# Altium PCB MB.PcbDoc
Units mil, origin at the board's own origin, x right, y up, seen from the top; angles counter-clockwise.
Board outline 5140 x 4225 mil, 2 copper layers (Top Layer, Bottom Layer); 58 components, 60 nets, 331 pads, 0 vias.
Unrouted connection lines stored in the file: 188.
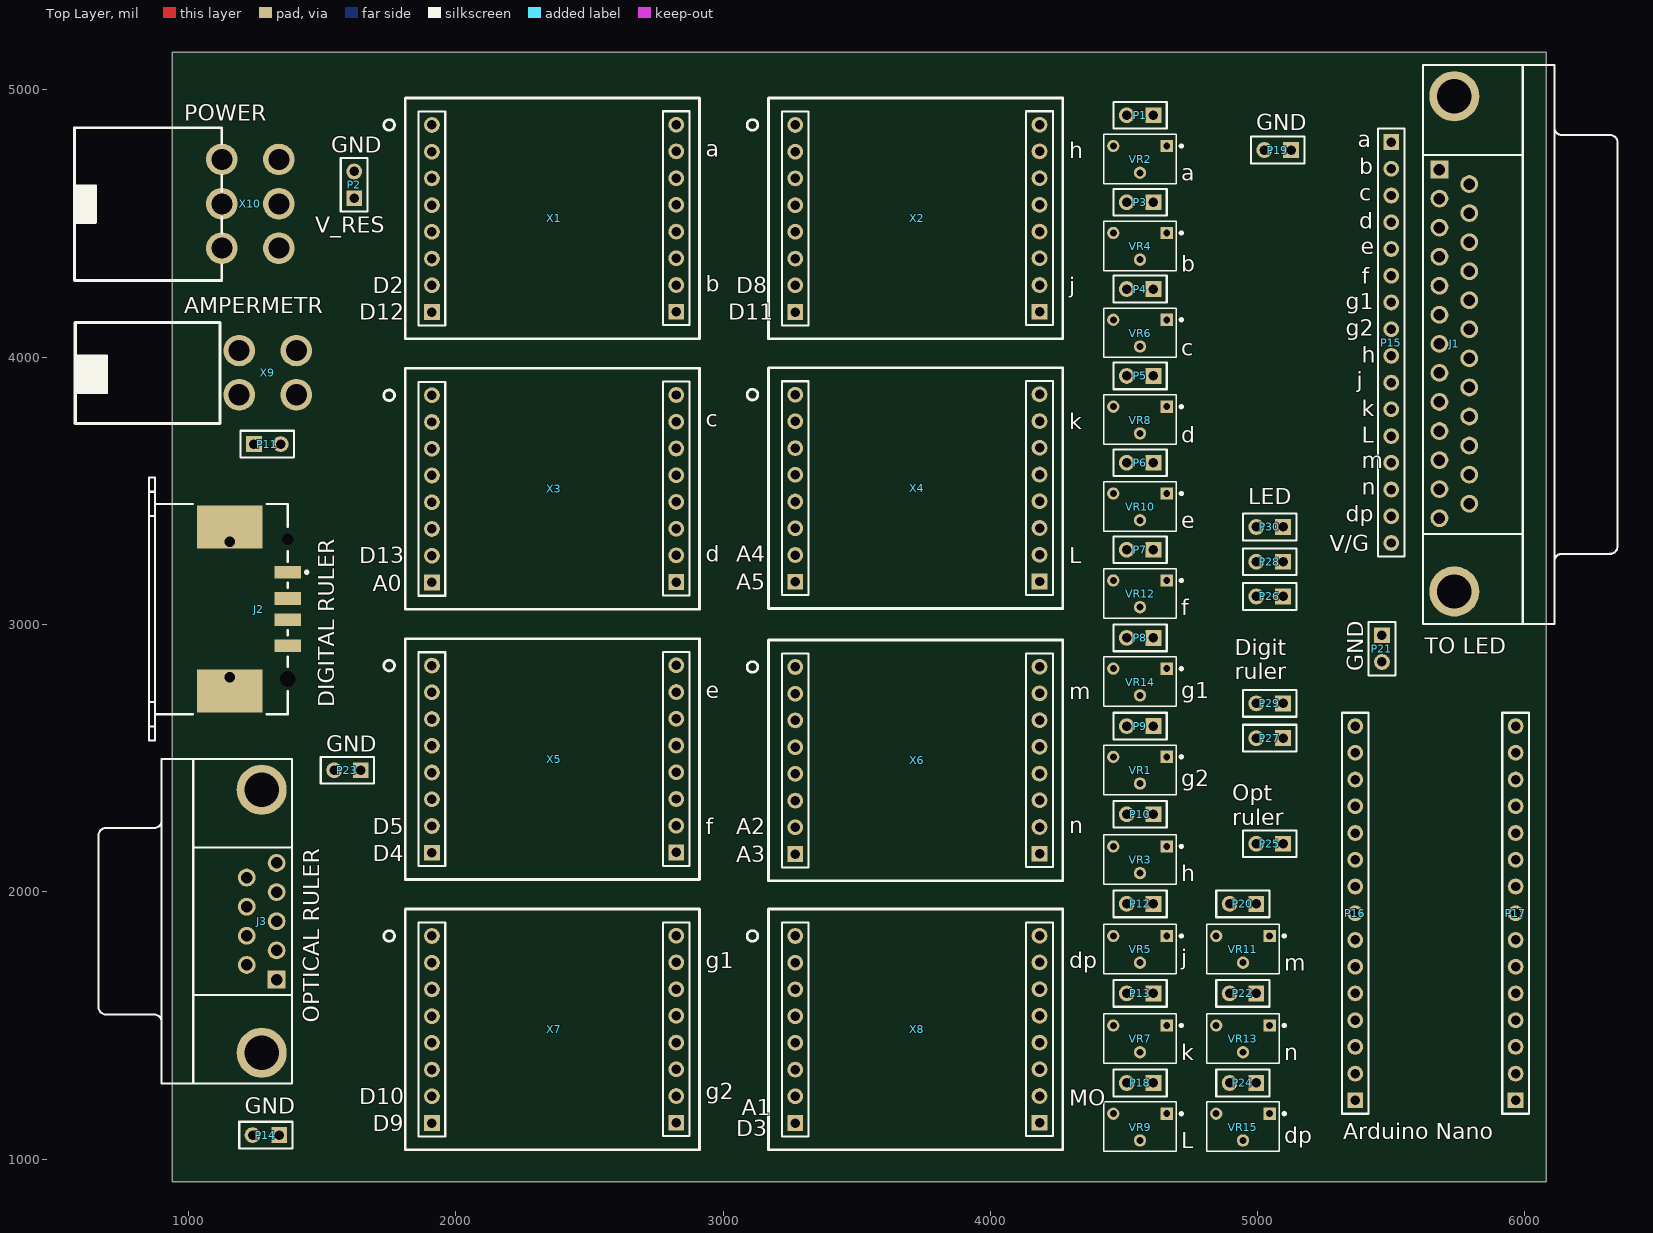
[diagram p0: Top Layer view]
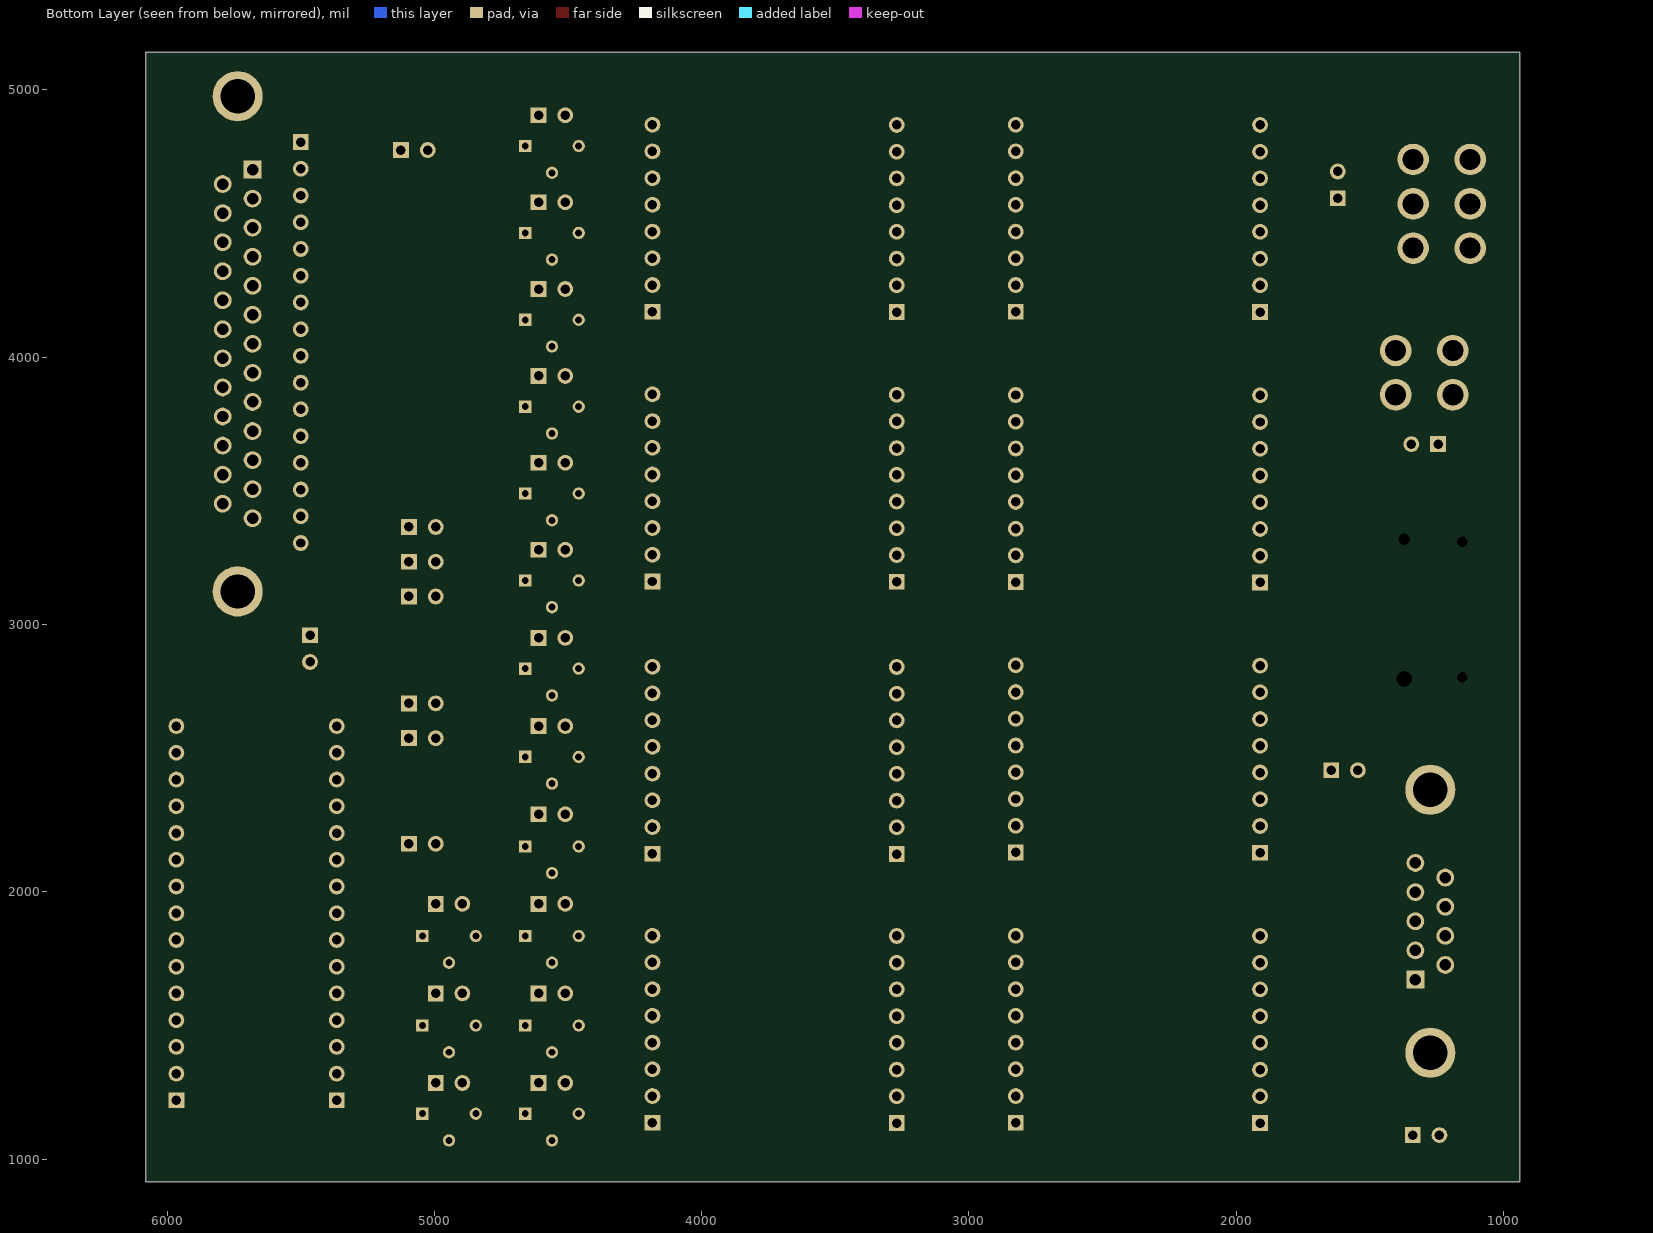
[diagram p1: Bottom Layer view, seen from below]

## Layer stack, top to bottom
Top Solder: solder mask 0.4, Solder Resist, Dk 3.5
Top Layer: signal copper 1.4
Dielectric 1: dielectric 12.6, FR-4, Dk 4.8
Bottom Layer: signal copper 1.4
Bottom Solder: solder mask 0.4, Solder Resist, Dk 3.5

## Board outline
940,915 6080,915 6080,5140 940,5140

## Design rules (kind name [scope] priority, off if disabled: settings)
Clearance [All] p1: gap=10 ignorepadtopadclearanceinfootprint=FALSE except(0: Arc-Hole Track-Hole SMDPad-Hole THPad-Hole Via-Hole Fill-Hole Poly-Hole Region-Hole Text-Hole)
PolygonConnect [All] p1: connectstyle=Relief reliefconductorwidth=10 reliefentries=4 polygonreliefangle="90 Angle" airgapwidth=10
RoutingVias [All] p1: holewidth=28 width=50 viastyle="Through Hole" minholewidth=28 minwidth=50 maxholewidth=28 maxwidth=50
SolderMaskExpansion [All] p1: expansion=4 istentingtop=FALSE
Width [All] p1: maxlimit=10 minlimit=10 preferedwidth=10
30 further rules are at their usual default settings.

## Components (designator, comment, footprint, x,y, rotation, side; value= is the part's Value field where it differs from the comment)
J1 "D Connector 25" DSUB1.385-2H25A 6110,4050 r270 top
J2 "1-353576-1" 353576 875.47,3057.89 r180 top
J3 "D Connector 9" DSUB1.385-2H9 900,1890 r90 top
P1 "Header 2" HDR1X2 4610,4905 r180 top
P2 "Header 2" HDR1X2 1620,4595 r90 top
P3 "Header 2" HDR1X2 4610,4580 r180 top
P4 "Header 2" HDR1X2 4610,4255 r180 top
P5 "Header 2" HDR1X2 4610,3930 r180 top
P6 "GND" HDR1X2 4610,3605 r180 top
P7 "GND" HDR1X2 4610,3280 r180 top
P8 "GND" HDR1X2 4610,2950 r180 top
P9 "GND" HDR1X2 4610,2620 r180 top
P10 "Header 2" HDR1X2 4610,2290 r180 top
P11 "Header 2" HDR1X2 1245,3675 r0 top
P12 "Header 2" HDR1X2 4610,1955 r180 top
P13 "GND" HDR1X2 4610,1620 r180 top
P14 "GND" HDR1X2 1340,1090 r180 top
P15 "Header 16" HDR1X16 5500,4805 r270 top
P16 "Header 15" HDR1X15 5365,1220 r90 top
P17 "Header 15" HDR1X15 5965,1220 r90 top
P18 "GND" HDR1X2 4610,1285 r180 top
P19 "GND" HDR1X2 5125,4775 r180 top
P20 "GND" HDR1X2 4995,1955 r180 top
P21 "GND" HDR1X2 5465,2960 r270 top
P22 "GND" HDR1X2 4995,1620 r180 top
P23 "GND" HDR1X2 1645,2455 r180 top
P24 "GND" HDR1X2 4995,1285 r180 top
P25 "Digit_rul" HDR1X2 5095,2180 r180 top
P26 "Relay" HDR1X2 5095,3105 r180 top
P27 "Optic_rul" HDR1X2 5095,2575 r180 top
P28 "Relay" HDR1X2 5095,3235 r180 top
P29 "Optic_rul" HDR1X2 5095,2705 r180 top
P30 "Relay" HDR1X2 5095,3365 r180 top
VR1 "RES 3266W" "RES 3266W" 4660,2505 r180 top
VR2 "RES 3266W" "RES 3266W" 4660,4790 r180 top
VR3 "RES 3266W" "RES 3266W" 4660,2170 r180 top
VR4 "RES 3266W" "RES 3266W" 4660,4465 r180 top
VR5 "RES 3266W" "RES 3266W" 4660,1835 r180 top
VR6 "RES 3266W" "RES 3266W" 4660,4140 r180 top
VR7 "RES 3266W" "RES 3266W" 4660,1500 r180 top
VR8 "RES 3266W" "RES 3266W" 4660,3815 r180 top
VR9 "RES 3266W" "RES 3266W" 4660,1170 r180 top
VR10 "RES 3266W" "RES 3266W" 4660,3490 r180 top
VR11 "RES 3266W" "RES 3266W" 5045,1835 r180 top
VR12 "RES 3266W" "RES 3266W" 4660,3165 r180 top
VR13 "RES 3266W" "RES 3266W" 5045,1500 r180 top
VR14 "RES 3266W" "RES 3266W" 4660,2835 r180 top
VR15 "RES 3266W" "RES 3266W" 5045,1170 r180 top
X1 "MEZ_RELAY" MEZ_RELAY 1911,4869 r0 top
X2 "MEZ_RELAY" MEZ_RELAY 3270,4869 r0 top
X3 "MEZ_RELAY" MEZ_RELAY 1911,3857.67 r0 top
X4 "MEZ_RELAY" MEZ_RELAY 3270,3860 r0 top
X5 "MEZ_RELAY" MEZ_RELAY 1911,2846.33 r0 top
X6 "MEZ_RELAY" MEZ_RELAY 3270,2841.33 r0 top
X7 "MEZ_RELAY" MEZ_RELAY 1911,1835 r0 top
X8 "MEZ_RELAY" MEZ_RELAY 3270,1835 r0 top
X9 "AMPERMETR" AMP_VOLTMETER 1403.5,4025 r270 top
X10 "POWER" POWER 1125,4740 r90 top

## Footprints (in the part's own frame and the unit in brackets; to place one, negate y for a bottom-side part, rotate by r counter-clockwise, add the part's x,y. Pads: shape width x height; smd on the part's side, far side on the other; paste and mask are expansions set on the pad)
353576 [mm] "Connector; USB1.1, Type A, SM; 4 Position; Right Angle"
  rect 2.5x1.2 smd: 1(-12.6,-3.5) 2(-12.6,-1) 3(-12.6,1) 4(-12.6,3.5)
  rect 6.2x4.1 smd: 5(-7.1,7.8) 6(-7.1,-7.8)
  round 0.7 hole 1 unplated: MH1(-7.1,6.496) MH2(-7.1,-6.404)
  round 1.2 hole 1.5 unplated: MH3(-12.6,6.65)
  round 0.8 hole 1.1 unplated: MH4(-12.6,-6.65)
  silkscreen extent -14.53,-12.5 0.6,12.5
AMP_VOLTMETER [mm] "AMP_VOLTMETER"
  round 3 hole 2: 1(0,0) 2(0,-5.423) 3(4.2,-5.423) 4(4.2,0)
  silkscreen extent -2.66,-21 6.94,-7.25
DSUB1.385-2H9 [mm] "Connector; D Subminiature; 9 Position; Right Angle; Pitch 1.385 mm"
  rect 1.69x1.69 hole 1.09: 1(-5.54,-10.92)
  round 1.69 hole 1.09: 2(-2.77,-10.92) 3(0,-10.92) 4(2.77,-10.92) 5(5.54,-10.92) 6(-4.155,-8.08) 7(-1.385,-8.08) 8(1.385,-8.08) 9(4.155,-8.08)
  round 4.76 hole 3.26: 10(-12.495,-9.5) 11(12.495,-9.5)
  silkscreen extent -15.4,-12.4 15.4,6
DSUB1.385-2H25A [mm] "Connector; D Subminiature; 25 Position; Right Angle; Pitch 1.385 mm"
  rect 1.69x1.69 hole 1.09: 1(-16.566,-10.92)
  round 1.69 hole 1.09: 2(-13.805,-10.92) 3(-11.044,-10.92) 4(-8.283,-10.92) 5(-5.522,-10.92) 6(-2.761,-10.92) 7(0,-10.92) 8(2.761,-10.92) 9(5.522,-10.92) 10(8.283,-10.92) 11(11.044,-10.92) 12(13.805,-10.92) 13(16.566,-10.92) 14(-15.185,-8.08) 15(-12.424,-8.08) 16(-9.663,-8.08) 17(-6.902,-8.08) 18(-4.141,-8.08) 19(-1.38,-8.08) 20(1.381,-8.08) 21(4.142,-8.08) 22(6.903,-8.08) 23(9.664,-8.08) 24(12.425,-8.08) 25(15.186,-8.08)
  round 4.76 hole 3.26: 26(-23.526,-9.5) 27(23.526,-9.5)
  silkscreen extent -26.5,-12.5 26.6,6
HDR1X2 [mm] "Connector; Header; 2 Position"
  rect 1.5x1.5 hole 0.9: 1(0,0)
  round 1.5 hole 0.9: 2(2.54,0)
  silkscreen extent -1.27,-1.27 3.81,1.27
HDR1X15 [mm] "Connector; Header; 15 Position"
  rect 1.5x1.5 hole 0.9: 1(0,0)
  round 1.5 hole 0.9: 2(2.54,0) 3(5.08,0) 4(7.62,0) 5(10.16,0) 6(12.7,0) 7(15.24,0) 8(17.78,0) 9(20.32,0) 10(22.86,0) 11(25.4,0) 12(27.94,0) 13(30.48,0) 14(33.02,0) 15(35.56,0)
  silkscreen extent -1.27,-1.27 36.83,1.27
HDR1X16 [mm] "Connector; Header; 16 Position"
  rect 1.5x1.5 hole 0.9: 1(0,0)
  round 1.5 hole 0.9: 2(2.54,0) 3(5.08,0) 4(7.62,0) 5(10.16,0) 6(12.7,0) 7(15.24,0) 8(17.78,0) 9(20.32,0) 10(22.86,0) 11(25.4,0) 12(27.94,0) 13(30.48,0) 14(33.02,0) 15(35.56,0) 16(38.1,0)
  silkscreen extent -1.27,-1.27 39.37,1.27
MEZ_RELAY [mm] "мезонин реле"
  round 1.5 hole 0.9: 1(0,0) 2(0,-2.54) 3(0,-5.08) 4(0,-7.62) 5(0,-10.16) 6(0,-12.7) 7(0,-15.24) 10(23.216,-15.215) 11(23.216,-12.675) 12(23.216,-10.135) 13(23.216,-7.595) 14(23.216,-5.055) 15(23.216,-2.515) 16(23.216,0.025)
  rect 1.5x1.5 hole 0.9: 8(0,-17.78) 9(23.216,-17.755)
  silkscreen extent -4.57,-20.32 25.43,2.57
POWER [mm] "POWER"
  round 3 hole 2: 1(0,0) 2(-4.217,0) 3(-8.435,0) 4(0,-5.422) 5(-4.217,-5.422) 6(-8.435,-5.422)
  silkscreen extent -11.5,0 3,14
"RES 3266W" [mm]
  rect 1.168x1.168 hole 0.66: 1(0,0)
  round 1.168 hole 0.66: 2(2.54,2.54) 3(5.08,0)
  silkscreen extent -1.49,-1.12 5.99,3.58, body extent -0.81,-1.02 5.9,3.48, height 8.77

## Part data
J1: "Receptacle Assembly, 25 Position, Right Angle", PackageDocument=U, DatasheetDocument=19-Mar-1999, Gender=Receptacle, LatestRevisionDate=17-Jul-2002, LatestRevisionNote="Re-released for DXP Platform.", Orientation="Right Angle", PackageReference=787202, Positions=25, Published=15-Jun-2001, Publisher="Altium Limited"
J2: "USB 1.1, Right Angle, SMT, A Type, Receptacle, 4 Position, White", PackageDocument=11-Apr-2003, ComponentLink1Description="Manufacturer Link", ComponentLink1URL=http://www.tycoelectronics.com/, ComponentLink2Description="Packaging Specification", ComponentLink2URL=http://ecommas.tycoelectronics.com/commerce/DocumentDelivery/DDEController?Action=showdoc&DocId=Customer+Drawing%7F353576%7FD%7Ftif%7FJapanese%7FJPN_CD_353576_D.tif, ContactMaterial="Copper Alloy", ContactPlating="Gold over Palladium Nickel", DatasheetDocument=11-Apr-2003, DrillSize="Corresponds to nominal value.", HousingMaterial=Thermoplastic, PackageReference=353576, PanelGround=Without, PCB_Layout="Complies with manufacturer's recommendation.", Published=15-Jul-2004, Publisher="Altium Limited"
J3: "Receptacle Assembly, 9 Position, Right Angle", PackageDocument=O, DatasheetDocument=1-Sep-1999, Gender=Receptacle, LatestRevisionDate=17-Jul-2002, LatestRevisionNote="Re-released for DXP Platform.", Orientation="Right Angle", PackageReference=788750, Positions=9, Published=15-Jun-2001, Publisher="Altium Limited"
P1 P2 P3 P4 P5 P10 P11 P12: "Header, 2-Pin", LatestRevisionDate=17-Jul-2002, LatestRevisionNote="Re-released for DXP Platform.", Publisher="Altium Limited"
P6 P7 P8 P9 P13 P14 P18 P19 P20 P21 P22 P23 P24 P25 P26 P27 P28 P29 P30: library part "Header 2", "Header, 2-Pin", LatestRevisionDate=17-Jul-2002, LatestRevisionNote="Re-released for DXP Platform.", Publisher="Altium Limited"
P15: "Header, 16-Pin", LatestRevisionDate=17-Jul-2002, LatestRevisionNote="Re-released for DXP Platform.", Publisher="Altium Limited"
P16 P17: "Header, 15-Pin", LatestRevisionDate=17-Jul-2002, LatestRevisionNote="Re-released for DXP Platform.", Publisher="Altium Limited"
X9: library part AMP_VOLTMETR

## Nets (pads, with @x,y where several pads share a name; then routed paths per layer and width w, separated by ;. In a path a pad name is that pad's centre, name@x,y a point inside that pad or via, vN(x,y) a via of type N, cw(c..) or ccw(c..) an arc to the next point about the centre after c; other vN are vias at no path point)
a: P1.2 VR2.3 X1.15
A0: P17.4 X3.8
A1: P17.5 P25.1 P26.1
A1_relay: P26.2 X8.7
A1_ruler: J2.3 P25.2
A2: P17.6 X6.7
A3: P17.7 X6.8
A4: P17.8 X4.7
A5: P17.9 X4.8
a_0: J1.1 P1.1 P15.1 VR2.1 VR2.2
b: P3.2 VR4.3 X1.10
b_0: J1.2 P3.1 P15.2 VR4.1 VR4.2
c: P4.2 VR6.3 X3.15
c_0: J1.3 P4.1 P15.3 VR6.1 VR6.2
d: P5.2 VR8.3 X3.10
D2: P16.11 P29.1 P30.1
D2_relay: P30.2 X1.7
D2_ruler: J3.8 P29.2
D3: P16.10 P27.1 P28.1
D3_relay: P28.2 X8.8
D3_ruler: J3.6 P27.2
D4: P16.9 X5.8
D5: P16.8 X5.7
D7: J2.2 P16.6
D8: P16.5 X2.7
D9: P16.4 X7.8
D10: P16.3 X7.7
D11: P16.2 X2.8
D12: P16.1 X1.8
D13: P17.1 X3.7
d_0: J1.4 P5.1 P15.4 VR8.1 VR8.2
dp: P24.2 VR15.3 X8.15
dp_0: J1.15 P15.15 P24.1 VR15.1 VR15.2
e: P6.2 VR10.3 X5.15
e_0: J1.5 P6.1 P15.5 VR10.1 VR10.2
f: P7.2 VR12.3 X5.10
f_0: J1.6 P7.1 P15.6 VR12.1 VR12.2
g1: P8.2 VR14.3 X7.15
g1_0: J1.7 P8.1 P15.7 VR14.1 VR14.2
g2: P9.2 VR1.3 X7.10
g2_0: J1.8 P9.1 P15.8 VR1.1 VR1.2
GND: J2.4 J3.2 P2.2 P14.1 P14.2 P16.12 P17.14 P19.1 P19.2 P21.1 P21.2 P23.1 P23.2 X1.12 X2.12 X3.12 X4.12 X5.12 X6.12 X7.12 X8.6 X8.11 X8.12 X10.4 X10.5 X10.6
h: P10.2 VR3.3 X2.15
h_0: J1.9 P10.1 P15.9 VR3.1 VR3.2
j: P12.2 VR5.3 X2.10
j_0: J1.10 P12.1 P15.10 VR5.1 VR5.2
k: P13.2 VR7.3 X4.15
k_0: J1.11 P13.1 P15.11 VR7.1 VR7.2
l: P18.2 VR9.3 X4.10
l_0: J1.12 P15.12 P18.1 VR9.1 VR9.2
m: P20.2 VR11.3 X6.15
m_0: J1.13 P15.13 P20.1 VR11.1 VR11.2
MASTER_OUT: X1.9 X1.14 X2.9 X2.14 X3.9 X3.14 X4.9 X4.14 X5.9 X5.14 X6.9 X6.14 X7.9 X7.14 X8.10 X8.14
n: P22.2 VR13.3 X6.10
n_0: J1.14 P15.14 P22.1 VR13.1 VR13.2
V/G_FROM_A: P11.2 X1.11 X1.16 X2.11 X2.16 X3.11 X3.16 X4.11 X4.16 X5.11 X5.16 X6.11 X6.16 X7.11 X7.16 X8.5 X8.16 X9.1
V/G_TO_A: J1.16 P11.1 P15.16 X9.2
V_LED: X8.4 X8.9 X10.2
V_MB: J3.7 X1.13 X2.13 X3.13 X4.13 X5.13 X6.13 X7.13 X8.13 X10.1
V_RESERVE: P2.1 X10.3
pads on no net: J1.17 J1.18 J1.19 J1.20 J1.21 J1.22 J1.23 J1.24 J1.25 J1.26 J1.27 J2.1 J2.5 J2.6 J2.MH1 J2.MH2 J2.MH3 J2.MH4 J3.1 J3.3 J3.4 J3.5 J3.9 J3.10 J3.11 P16.7 P16.13 P16.14 P16.15 P17.2 P17.3 P17.10 P17.11 P17.12 P17.13 P17.15 X1.1 X1.2 X1.3 X1.4 X1.5 X1.6 X2.1 X2.2 X2.3 X2.4 X2.5 X2.6 X3.1 X3.2 X3.3 X3.4 X3.5 X3.6 X4.1 X4.2 X4.3 X4.4 X4.5 X4.6 X5.1 X5.2 X5.3 X5.4 X5.5 X5.6 X6.1 X6.2 X6.3 X6.4 X6.5 X6.6 X7.1 X7.2 X7.3 X7.4 X7.5 X7.6 X8.1 X8.2 X8.3 X9.3 X9.4

## Silkscreen, mask and mechanical layers (free items; w line width, h text height)
Top Overlay:
  text "GND" at 4995,4850 h60
  text "a" at 5375,4785 h60
  text "GND" at 1535,4765 h60
  text "a" at 2935,4750 h60
  text "h" at 4295,4745 h60
  text "b" at 5380,4685 h60
  text "a" at 4715,4660 h60
  text "c" at 5380,4585 h60
  text "d" at 5380,4480 h60
  text "V_RES" at 1475,4465 h60
  text "e" at 5385,4385 h60
  text "b" at 4715,4320 h60
  text "f" at 5390,4275 h60
  text "b" at 2935,4245 h60
  text "D2" at 1690,4240 h60
  text "D8" at 3050.01,4240 h60
  text "j" at 4295,4239.99 h60
  text "g1" at 5330,4179.99 h60
  text "D12" at 1640.02,4140 h60
  text "D11" at 3020.02,4140 h60
  text "g2" at 5330,4079.99 h60
  text "c" at 4715,4005 h60
  text "h" at 5390,3980 h60
  text "j" at 5370,3884.99 h60
  text "k" at 5390,3780 h60
  text "c" at 2935,3740 h60
  text "k" at 4295,3730 h60
  text "d" at 4715,3680 h60
  text "L" at 5390,3680 h60
  text "m" at 5390,3585 h60
  text "n" at 5390,3485 h60
  text "LED" at 4965,3450 h60
  text "dp" at 5330,3384.99 h60
  text "e" at 4715,3360 h60
  text "V/G" at 5270,3275 h60
  text "d" at 2935,3235 h60
  text "A4" at 3050.01,3235 h60
  text "D13" at 1640.02,3230 h60
  text "L" at 4295,3230 h60
  text "A5" at 3050.01,3130 h60
  text "A0" at 1690,3125 h60
  text "f" at 4715,3035 h60
  text "TO LED" at 5625,2890 h60
  text "GND" at 5395,2825 h60 r90
  text "Digit / ruler" at 4915,2795 h60
  text "e" at 2935,2725 h60
  text "g1" at 4715,2724.99 h60
  text "m" at 4295,2720 h60
  text "DIGITAL RULER" at 1545,2690 h60 r90
  text "GND" at 1515,2525 h60
  text "g2" at 4715,2394.99 h60
  text "Opt / ruler" at 4905,2250 h60
  text "n" at 4295,2220 h60
  text "D5" at 1690,2215 h60
  text "f" at 2935,2215 h60
  text "A2" at 3050.01,2215 h60
  text "D4" at 1690,2115 h60
  text "A3" at 3050.01,2110 h60
  text "h" at 4715,2040 h60
  text "j" at 4715,1724.99 h60
  text "g1" at 2935,1714.99 h60
  text "dp" at 4295,1714.99 h60
  text "m" at 5100,1705 h60
  text "OPTICAL RULER" at 1490,1510 h60 r90
  text "k" at 4715,1370 h60
  text "n" at 5100,1370 h60
  text "g2" at 2935,1224.99 h60
  text "D10" at 1640.02,1205 h60
  text "MO" at 4295,1200 h60
  text "GND" at 1210,1170 h60
  text "A1" at 3070,1165 h60
  text "D9" at 1690,1105 h60
  text "D3" at 3050.01,1085 h60
  text "Arduino Nano" at 5320,1075 h60
  text "dp" at 5100,1059.99 h60
  text "L" at 4715,1040 h60